# Altium PCB Oscilloscope_O.P.PcbDoc (part 2 of 2)
Units mm, origin at the board's own origin, x right, y up, seen from the top; angles counter-clockwise.
Board outline 97.16 x 92.08 mm, 4 copper layers (L1 (Sig), L2 (GND), L3 (GND), L4 (Sig)), stack 1.589 mm thick; 119 components, 103 nets, 464 pads, 437 vias.
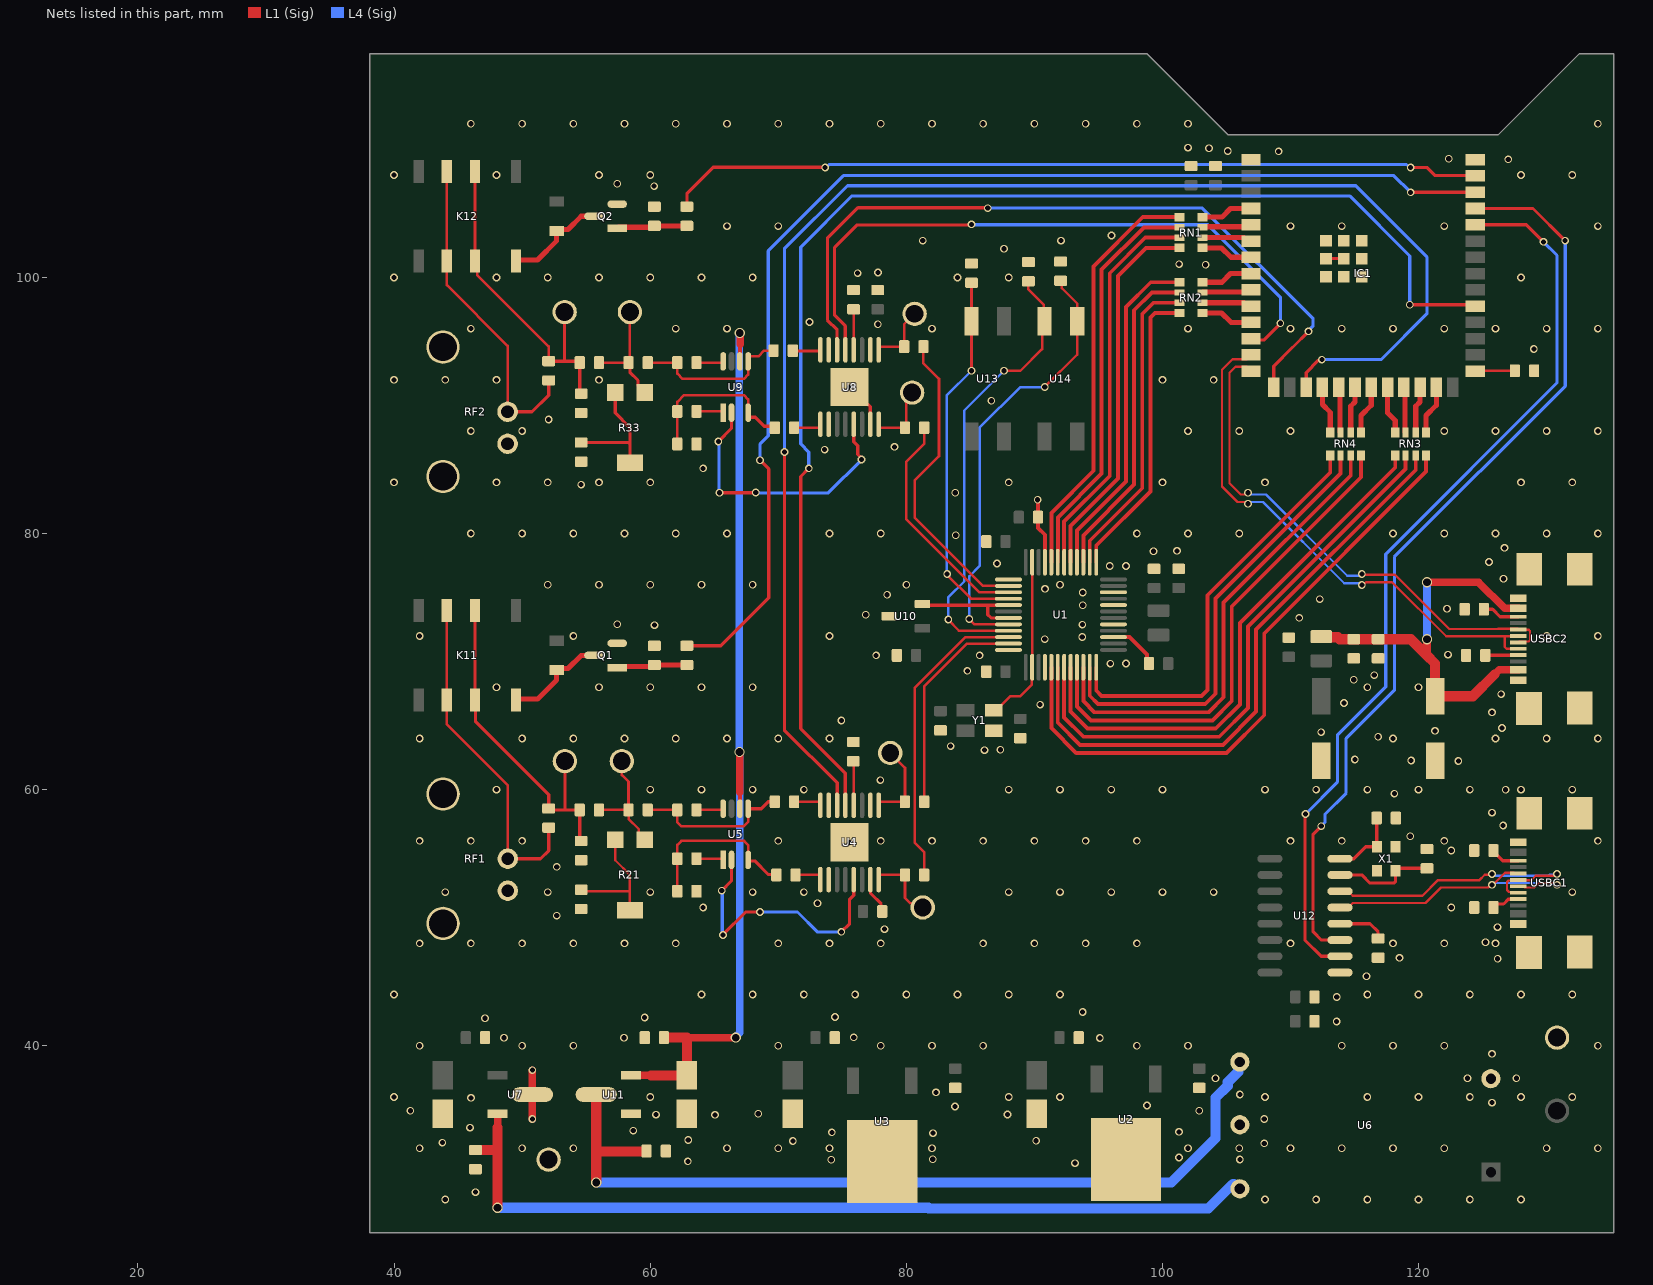
[diagram p4: the nets of this part, all layers, seen from the top]

## Via types
v1: diameter 0.6, hole 0.4, L1 (Sig) to L4 (Sig), 415 vias
v2: diameter 0.8, hole 0.6, L1 (Sig) to L4 (Sig), 22 vias

## Nets (pads, with @x,y where several pads share a name; then routed paths per layer and width w, separated by ;. In a path a pad name is that pad's centre, name@x,y a point inside that pad or via, vN(x,y) a via of type N, cw(c..) or ccw(c..) an arc to the next point about the centre after c; other vN are vias at no path point) (continued)
-5V: C35.1 C36.2 U5.6 U9.6 U11.3 | length 74.7
  L1 (Sig) w0.3: U5.6@67,58.515 67,59.798 ; U9.6@67.01,93.451 67.01,94.767
  L1 (Sig) w0.6: U11.3@58.506,37.695 60.068,37.695 60.075,37.688 ; 62.865,40.64 v2(66.675,40.64) ; v2(66.975,62.946) 67,62.921 67,59.798 ; 67.024,94.781 v2@67.024,95.625
  L1 (Sig) w0.8: 60.075,37.688 62.858,37.688 C36.2@62.865,37.695 62.865,40.64 C35.1@61.075,40.64
  L4 (Sig) w0.6: v2(66.675,40.64) 66.675,40.694 66.994,41.013 66.994,62.927 v2(66.975,62.946) ; v2@66.942,62.979 66.942,95.558 66.99,95.605 v2(66.99,95.66)
CH1_AC1: C33.2 K12.3 K12.6 RF2.1 | length 25.6
  L1 (Sig) w0.2: K12.3@44.12,108.275 K12.6@44.12,101.275 44.12,99.39 48.865,94.645 RF2.1@48.865,89.505
  L1 (Sig) w0.254: RF2.1@48.865,89.505 50.77,89.505 52.07,90.805 C33.2@52.07,91.96
CH1_AC2: C33.1 C37.1 K9.1 K12.2 K12.7 R29.2 | length 26.1
  L1 (Sig) w0.2: K12.2@46.32,108.275 K12.7@46.32,101.275 46.493,101.102 46.493,100.192 52.07,94.615 C33.1@52.07,93.46 ; C37.1@54.51,90.92 C37.1@54.61,90.92
  L1 (Sig) w0.254: C33.1@52.07,93.46 53.315,93.46 ; K9.1@53.315,97.296 53.315,93.46 ; C37.1@54.61,90.92 54.495,91.035 R29.2@54.495,93.345 54.38,93.46 53.315,93.46
CH1_ADC_signal_H: K7.1 R22.1 U8.8 | length 5.6
  L1 (Sig) w0.2: U8.8@77.84,88.54 77.84,88.334 77.909,88.265 R22.1@79.895,88.265 ; K7.1@80.45,91.009 80.391,91.068 80.272,91.068 80.01,90.807 R22.1@80.01,88.38 ; R22.1@79.895,88.265 R22.1@80.01,88.38 ; R22.1@79.895,88.265 R22.1@80.01,88.38
CH1_ADC_signal_L: K8.1 R24.1 U8.9 | length 5.1
  L1 (Sig) w0.2: U8.9@77.84,94.34 77.84,94.526 77.909,94.595 79.132,94.595 R24.1@79.832,94.595 79.832,96.342 K8.1@80.645,97.155
CH1_feedback+: R26.1 R27.1 R28.2 U9.5 | length 12.5
  L1 (Sig) w0.2: R27.1@59.805,93.345 R28.2@62.115,93.345 62.115,92.484 62.524,92.075 67.31,92.075 67.65,92.415 67.65,93.732 67.759,93.841 68.441,93.841 68.879,94.279 R26.1@69.634,94.279
CH1_feedback-: R25.1 R31.1 R32.2 U9.4 | length 12.9
  L1 (Sig) w0.2: R31.1@62.115,86.995 R32.2@62.115,89.535 62.115,90.27 62.65,90.805 67.31,90.805 67.65,90.465 U9.4@67.65,89.44
  L1 (Sig) w0.254: U9.4@67.65,89.44 67.65,89.157 67.734,89.073 68.211,89.073 68.906,88.377 69.623,88.377 R25.1@69.735,88.265
CH1_Relay: IC1.39 R37.1 | length 63.9
  L1 (Sig) w0.254: R37.1@62.865,105.525 62.865,106.539 64.921,108.594 v1@73.651,108.594 ; v1(119.38,108.585) 120.65,108.585 121.285,107.95 124.39,107.95 IC1.39@124.42,107.92
  L4 (Sig) w0.254: v1(73.66,108.585) 73.751,108.585 73.982,108.816 119.058,108.816 119.289,108.585 v1(119.38,108.585)
CH2_AC1: C28.2 K11.3 K11.6 RF1.1 | length 26.6
  L1 (Sig) w0.2: K11.3@44.12,73.985 K11.6@44.12,66.985 44.12,65.1 48.88,60.34 RF1.1@48.88,54.61
  L1 (Sig) w0.254: RF1.1@48.88,54.61 51.435,54.61 52.07,55.245 C28.2@52.07,57.035
CH2_AC2: C28.1 C29.1 K4.1 K11.2 K11.7 R17.2 | length 27
  L1 (Sig) w0.2: K11.7@46.24,66.905 K11.7@46.32,66.985 K11.2@46.32,73.985 ; C29.1@54.343,55.728 C29.1@54.61,55.995
  L1 (Sig) w0.254: K11.7@46.24,66.905 46.355,66.79 46.355,65.334 52.07,59.619 C28.1@52.07,58.535 52.185,58.42 53.34,58.42 ; K4.1@53.34,62.23 53.34,58.42 ; C29.1@54.61,55.995 54.495,56.11 R17.2@54.495,58.42 53.34,58.42
CH2_ADC_signal_H: K3.1 R12.1 U4.8 | length 5.9
  L1 (Sig) w0.2: U4.8@77.84,52.98 77.84,53.271 77.909,53.34 R12.1@79.895,53.34 79.895,51.55 80.32,51.125 80.955,51.125 K3.1@81.28,50.8
CH2_ADC_signal_L: K6.1 R16.1 U4.9 | length 6.6
  L1 (Sig) w0.2: U4.9@77.84,58.78 77.84,58.986 77.909,59.055 R16.1@79.895,59.055 ; K6.1@78.74,62.865 79.895,61.71 R16.1@79.895,59
CH2_feedback+: R13.1 R14.1 R15.2 U5.5 | length 12.4
  L1 (Sig) w0.2: R14.1@59.805,58.42 R15.2@62.115,58.42 62.115,57.444 62.409,57.15 67.31,57.15 67.65,57.49 U5.5@67.65,58.515 U5.5@67.664,58.515
  L1 (Sig) w0.254: U5.5@67.664,58.515 68.675,58.515 69.215,59.055 R13.1@69.735,59.055
CH2_feedback-: R11.1 R19.1 R20.2 U5.4 | length 13.2
  L1 (Sig) w0.2: R19.1@62.115,52.07 R20.2@62.115,54.61 62.115,55.678 62.432,55.995 67.323,55.995 67.65,55.668 U5.4@67.65,54.515
  L1 (Sig) w0.254: U5.4@67.65,54.515 67.657,54.515 67.734,54.438 68.157,54.438 69.218,53.377 69.813,53.377 R11.1@69.85,53.34
CH2_Relay: IC1.38 R38.1 | length 93.8
  L1 (Sig) w0.254: R38.1@62.865,71.235 65.52,71.235 69.261,74.976 69.261,85.044 v1(68.58,85.725) ; v1(119.383,106.64) 124.41,106.64 IC1.38@124.42,106.65
  L4 (Sig) w0.254: v1(68.58,85.725) 68.58,86.995 69.215,87.63 69.215,102.072 75.092,107.948 118.075,107.948 v1(119.383,106.64)
CLCK1: IC1.12 U8.13 | length 51.2
  L1 (Sig) w0.254: U8.13@75.24,94.34 75.24,96.21 74.4,97.05 74.4,102.34 76.155,104.095 85.045,104.095 v1(85.09,104.14) ; IC1.12@106.92,95.22 107.034,95.106 107.919,95.106 109.207,96.394 v1(109.207,96.422)
  L4 (Sig) w0.254: v1(85.09,104.14) 85.113,104.117 103.528,104.117 109.22,98.425 109.22,96.434 v1(109.207,96.422)
CLCK2: IC1.31 U4.13 | length 105.7
  L1 (Sig) w0.254: v1(72.39,85.09) 71.755,84.455 71.755,64.77 75.24,61.285 U4.13@75.24,58.78 ; v1(119.309,97.861) 124.319,97.861 IC1.31@124.42,97.76
  L4 (Sig) w0.254: v1(72.39,85.09) 72.39,86.36 71.755,86.995 71.755,102.362 75.758,106.365 114.615,106.365 119.309,101.671 v1(119.309,97.861)
CON1_USB_N: U12.6 USBC1.A7 USBC1.B7 | length 23.7
  L1 (Sig) w0.18: U12.6@113.861,52.07 114.513,52.07 114.858,51.725 120.305,51.725 121.519,52.939 124.749,52.939 125.16,53.35 125.658,53.35 v1(125.73,53.422) ; USBC1.B7@127.795,51.955 127.735,52.015 127.055,52.015 126.905,52.165 126.905,52.8 127.01,52.905 127.235,52.905 127.285,52.955 USBC1.A7@127.795,52.955 127.815,52.935 128.794,52.935 129.144,53.285 130.559,53.285 130.696,53.422 v1(130.81,53.422)
  L4 (Sig) w0.18: v1(125.73,53.422) 125.844,53.422 125.981,53.285 130.175,53.285 130.24,53.35 130.738,53.35 v1(130.81,53.422)
CON1_USB_P: U12.5 USBC1.A6 USBC1.B6 | length 22.7
  L1 (Sig) w0.18: U12.5@113.861,50.8 114.513,50.8 114.858,51.145 120.545,51.145 121.759,52.359 125.415,52.359 125.624,52.568 125.811,52.568 126.758,53.515 127.444,53.515 USBC1.B6@127.387,53.459 ; USBC1.A6@128.27,52.355 129.035,52.355 129.384,52.705 130.559,52.705 130.696,52.568 v1(130.81,52.568)
  L4 (Sig) w0.18: v1(125.73,52.568) 125.844,52.568 125.981,52.705 130.175,52.705 130.24,52.64 130.738,52.64 v1(130.81,52.568)
D0A: RN2.8 U1.37 | length 23.3
  L1 (Sig) w0.3: U1.37@94.825,77.76 94.825,79.06 99.06,83.295 99.06,96.861 99.424,97.225 RN2.8@101.335,97.225
D0A_ESP: IC1.11 RN2.1 | length 4.1
  L1 (Sig) w0.4: RN2.1@103.135,97.225 104.61,97.225 105.345,96.49 IC1.11@106.92,96.49
D0B: RN4.5 U1.24 | length 33.2
  L1 (Sig) w0.3: U1.24@94.825,69.56 94.825,67.735 95.25,67.31 103.043,67.31 103.505,67.772 103.505,75.181 113.1,84.776 RN4.5@113.1,86.095
D0B_ESP: IC1.18 RN4.4 | length 3.8
  L1 (Sig) w0.4: IC1.18@112.495,91.43 112.495,90.07 113.1,89.465 RN4.4@113.1,87.895
D1A: RN2.7 U1.38 | length 24.4
  L1 (Sig) w0.3: U1.38@94.325,77.76 94.325,79.438 98.425,83.538 98.425,97.155 99.295,98.025 RN2.7@101.335,98.025
D1A_ESP: IC1.10 RN2.2 | length 3.9
  L1 (Sig) w0.4: RN2.2@103.135,98.025 106.355,98.025 106.62,97.76 IC1.10@106.92,97.76
D1B: RN4.6 U1.23 | length 35.3
  L1 (Sig) w0.3: U1.23@94.325,69.56 94.325,68.66 94.327,68.658 94.327,67.337 94.967,66.697 103.341,66.697 104.14,67.495 104.14,74.93 113.9,84.69 RN4.6@113.9,86.095
D1B_ESP: IC1.19 RN4.3 | length 3.6
  L1 (Sig) w0.4: IC1.19@113.765,91.43 113.85,91.345 113.85,87.945 RN4.3@113.9,87.895
D2A: RN2.6 U1.39 | length 25.4
  L1 (Sig) w0.3: U1.39@93.825,77.76 93.825,79.855 97.79,83.82 97.79,97.438 99.177,98.825 RN2.6@101.335,98.825
D2A_ESP: IC1.9 RN2.3 | length 3.9
  L1 (Sig) w0.4: RN2.3@103.135,98.825 103.185,98.875 106.765,98.875 IC1.9@106.92,99.03
D2B: RN4.7 U1.22 | length 37.4
  L1 (Sig) w0.3: U1.22@93.825,69.56 93.825,66.921 94.706,66.04 103.598,66.04 104.775,67.217 104.775,74.608 114.7,84.533 RN4.7@114.7,86.095
D2B_ESP: IC1.20 RN4.2 | length 3.7
  L1 (Sig) w0.4: RN4.2@114.7,87.895 114.7,89.935 115.035,90.27 IC1.20@115.035,91.43
D3A: RN2.5 U1.40 | length 26.5
  L1 (Sig) w0.3: U1.40@93.325,77.76 93.325,80.236 97.155,84.066 97.155,97.699 99.081,99.625 RN2.5@101.335,99.625
D3A_ESP: IC1.8 RN2.4 | length 4.1
  L1 (Sig) w0.4: RN2.4@103.135,99.625 104.64,99.625 105.315,100.3 IC1.8@106.92,100.3
D3B: RN4.8 U1.21 | length 39.6
  L1 (Sig) w0.3: U1.21@93.325,69.56 93.325,66.502 94.422,65.405 103.898,65.405 105.41,66.917 105.41,74.304 115.5,84.394 RN4.8@115.5,86.095
D3B_ESP: IC1.21 RN4.1 | length 3.9
  L1 (Sig) w0.4: RN4.1@115.5,87.895 115.5,89.21 116.305,90.015 IC1.21@116.305,91.43
D4A: RN1.8 U1.41 | length 29.6
  L1 (Sig) w0.3: U1.41@92.825,77.76 92.825,80.591 96.52,84.286 96.52,100.1 98.725,102.305 RN1.8@101.335,102.305
D4A_ESP: IC1.7 RN1.1 | length 4.1
  L1 (Sig) w0.4: RN1.1@103.135,102.305 104.61,102.305 105.345,101.57 IC1.7@106.92,101.57
D4B: RN3.5 U1.20 | length 42.5
  L1 (Sig) w0.3: U1.20@92.825,69.56 92.825,66.098 94.153,64.77 104.159,64.77 106.045,66.656 106.045,73.025 118.18,85.16 RN3.5@118.18,86.095
D4B_ESP: IC1.22 RN3.4 | length 3.8
  L1 (Sig) w0.4: IC1.22@117.575,91.43 117.575,89.435 118.18,88.83 RN3.4@118.18,87.895
D5A: RN1.7 U1.42 | length 30.6
  L1 (Sig) w0.3: U1.42@92.325,77.76 92.325,80.931 95.885,84.491 95.885,100.33 98.66,103.105 RN1.7@101.335,103.105
D5A_ESP: IC1.6 RN1.2 | length 3.9
  L1 (Sig) w0.4: RN1.2@103.135,103.105 106.355,103.105 106.62,102.84 IC1.6@106.92,102.84
D5B: RN3.6 U1.19 | length 44.6
  L1 (Sig) w0.3: U1.19@92.325,69.56 92.325,65.645 93.835,64.135 104.433,64.135 106.68,66.382 106.68,72.752 118.969,85.041 RN3.6@118.969,86.095
D5B_ESP: IC1.23 RN3.3 | length 3.6
  L1 (Sig) w0.4: IC1.23@118.845,91.43 118.93,91.345 118.93,87.945 RN3.3@118.98,87.895
D6A: RN1.6 U1.43 | length 31.7
  L1 (Sig) w0.3: U1.43@91.825,77.767 91.825,78.66 91.832,78.667 91.832,81.263 95.25,84.681 95.25,100.605 98.55,103.905 RN1.6@101.335,103.905
D6A_ESP: IC1.5 RN1.3 | length 3.9
  L1 (Sig) w0.4: RN1.3@103.135,103.905 103.185,103.955 106.765,103.955 IC1.5@106.92,104.11
D6B: RN3.7 U1.18 | length 46.8
  L1 (Sig) w0.3: U1.18@91.825,69.56 91.825,68.66 91.825,65.232 93.557,63.5 104.72,63.5 107.315,66.095 107.315,72.497 119.78,84.962 RN3.7@119.78,86.095
D6B_ESP: IC1.24 RN3.2 | length 3.7
  L1 (Sig) w0.4: RN3.2@119.78,87.895 119.78,89.935 120.115,90.27 IC1.24@120.115,91.43
D7A: RN1.5 U1.44 | length 32.8
  L1 (Sig) w0.3: U1.44@91.325,77.76 91.325,79.368 91.332,79.375 91.332,81.618 94.615,84.901 94.615,100.858 98.462,104.705 RN1.5@101.335,104.705
D7A_ESP: IC1.4 RN1.4 | length 4.1
  L1 (Sig) w0.4: RN1.4@103.135,104.705 104.64,104.705 105.315,105.38 IC1.4@106.92,105.38
D7B: RN3.8 U1.17 | length 48.9
  L1 (Sig) w0.3: U1.17@91.325,69.56 91.325,64.803 93.263,62.865 105.002,62.865 107.95,65.813 107.95,72.203 120.58,84.833 RN3.8@120.58,86.095
D7B_ESP: IC1.25 RN3.1 | length 3.9
  L1 (Sig) w0.4: RN3.1@120.58,87.895 120.58,89.21 121.385,90.015 IC1.25@121.385,91.43
DATA1: IC1.15 U8.14 | length 58.1
  L1 (Sig) w0.254: U8.14@74.59,94.34 74.59,95.922 73.843,96.67 73.843,103.053 76.223,105.433 86.337,105.433 v1(86.36,105.41) ; IC1.15@108.685,91.43 108.685,93.074 110.139,94.528 110.153,94.528 v1(111.41,95.785)
  L4 (Sig) w0.254: v1(86.36,105.41) 103.117,105.411 111.76,96.768 111.76,96.229 111.41,95.878 v1(111.41,95.785)
DATA2: IC1.17 U4.14 | length 116.6
  L1 (Sig) w0.254: v1(70.485,86.36) 70.485,64.645 74.599,60.531 74.599,58.789 U4.14@74.59,58.78 ; IC1.17@111.225,91.43 111.225,92.566 112.175,93.516 112.382,93.516 v1(112.449,93.582)
  L4 (Sig) w0.254: v1(70.485,86.36) 70.485,102.235 75.405,107.155 115.095,107.155 120.65,101.6 120.65,97.155 117.083,93.588 v1@112.455,93.588
GND: C1.1 C2.2 C3.2 C4.2 C5.2 C6.2 C7.2 C8.1 C9.1 C10.1 C11.2 C12.2 C13.2 C14.2 C15.2 C16.2 C17.2 C18.2 C19.2 C20.2 C21.2 C22.2 C23.2 C24.1 C25.2 C26.2 C27.1 C29.2 C30.2 C31.2 C32.1 C34.2 C35.2 C36.1 C37.2 C38.1 C39.1 IC1.1 IC1.40 IC1.41 IC1.42 IC1.43 IC1.44 IC1.45 IC1.46 IC1.47 IC1.48 IC1.49 K2.1 K?.1 Q1.2 Q2.2 R1.1 R3.2 R4.2 R6.2 R7.2 R8.1 R9.1 R10.1 R18.1 R19.2 R23.2 R30.1 R31.2 R34.2 R35.2 R36.2 RF1.2 RF1.3 RF1.4 RF2.2 RF2.3 RF2.4 U1.1 U1.12 U1.16 U1.27 U1.29 U1.32 U1.34 U1.45 U2.4 U3.4 U4.2 U4.7 U4.10 U4.15 U4.17 U6.2 U6.4 U7.2 U8.2 U8.7 U8.10 U8.15 U8.17 U10.3 U11.1 U12.1 USBC1.13 USBC1.14 USBC1.15 USBC1.16 USBC1.A1B12 USBC1.B1A12 USBC2.13 USBC2.14 USBC2.15 USBC2.16 USBC2.A1B12 USBC2.B1A12 X1.2 X1.4 Y1.2 | length 22.8
  L1 (Sig) w0.254: U4.2@73.94,52.98 U4.2@73.94,53.805 ; U8.17@76.765,91.44 76.765,90.24 76.938,90.067 77.041,90.067 77.19,89.918 U8.7@77.19,88.54 ; U4.7@77.19,53.805 U4.7@77.19,52.98 77.208,52.962 77.208,51.895 78.026,51.076 78.026,50.687 C39.1@78.267,50.446 ; IC1.44@112.77,101.47 IC1.41@114.17,101.47
  L1 (Sig) w0.3: v1(90.254,82.637) 90.27,82.621 90.27,81.295 C15.2@90.285,81.28 90.285,80.441 90.825,79.901 U1.45@90.825,77.76 ; U1.27@96.175,71.91 97.434,71.91 98.781,70.564 98.781,70.014 C13.2@98.945,69.85
  L1 (Sig) w0.4: R34.2@54.61,85.61 R34.2@54.725,85.725 ; Q1.2@57.425,71.435 Q1.2@57.459,71.401 ; Q2.2@57.425,105.725 Q2.2@57.459,105.691 ; R35.2@60.159,71.401 R35.2@60.325,71.235 ; R36.2@60.159,105.691 R36.2@60.325,105.525
  L1 (Sig) w0.6: v1(50.8,34.29) U7.2@50.8,36.195 v1(50.8,38.1)
  other v1: 44,28 108,28 112,28 116,28 120,28 124,28 128,28 46.355,28.575 93.173,30.836 62.94,30.977 74.142,31.1 106.045,31.115 82.06,31.141 101.294,31.284 42,32 50,32 54,32 66,32 70,32 74,32 82,32 102,32 106,32 110,32 114,32 118,32 122,32 130,32 134,32 107.95,32.385 43.77,32.44 71.139,32.564 90.14,32.586 62.969,32.637 82.08,33.176 74.182,33.238 101.294,33.278 58.679,33.372 45.932,33.611 107.95,34.29 65.056,34.606 60.457,34.621 87.901,34.642 68.435,34.695 41.275,34.925 102.87,34.925 83.803,35.266 98.791,35.334 125.73,35.56 46.014,35.936 40,36 60,36 88,36 92,36 108,36 116,36 120,36 124,36 128,36 132,36 106.045,36.195 82.322,36.364 104.14,37.465 123.825,37.465 127.635,37.465 125.73,39.37 42,40 50,40 54,40 70,40 78,40 82,40 86,40 98,40 102,40 114,40 118,40 122,40 134,40 95.109,40.614 48.583,40.629 57.96,40.632 75.892,40.661 113.6,41.896 47.102,42.153 59.567,42.214 74.428,42.253 93.764,42.644 113.614,43.806 40,44 64,44 68,44 72,44 76,44 80,44 84,44 88,44 92,44 116,44 120,44 124,44 128,44 132,44 115.93,45.434 126.173,46.796 118.509,46.869 42,48 46,48 50,48 54,48 58,48 62,48 70,48 74,48 78,48 86,48 90,48 94,48 98,48 110,48 118,48 122,48 126,48 125.22,48.082 78.298,49.107 126.158,49.267 52.705,50.165 64.135,50.8 122.555,50.8 73.067,51.129 44,52 52,52 60,52 68,52 72,52 88,52 92,52 96,52 100,52 104,52 132,52 52.705,53.975 122.555,55.245 75.565,55.88 42,56 46,56 50,56 70,56 78,56 82,56 86,56 90,56 94,56 98,56 110,56 114,56 122,56 134,56 119.346,56.363 126.604,57.204 125.73,58.205 118.11,59.69 48,60 60,60 64,60 68,60 72,60 88,60 92,60 96,60 100,60 108,60 112,60 116,60 120,60 124,60 126.799,59.996 128,60 132,60 77.975,60.745 123.102,62.243 119.421,62.271 115.022,62.358 86.101,63.084 87.346,63.113 83.461,63.398 42,64 50,64 54,64 58,64 62,64 66,64 70,64 74,64 118,64 126,64 130,64 134,64 116.84,64.135 112.392,64.494 121.283,64.595 126.519,64.823 74.93,65.405 125.73,66.04 90.446,66.637 114.175,66.773 126.447,67.463 48,68 56,68 60,68 64,68 68,68 116,68 120,68 114.935,68.58 116.539,68.941 84.764,69.274 95.934,69.842 97.155,69.85 77.644,70.484 85.725,70.485 122.302,70.543 90.805,71.755 93.733,71.919 42,72 54,72 74,72 130,72 134,72 60.336,72.844 93.746,72.888 57.432,72.914 110.677,73.417 76.835,73.66 122.222,74.124 93.772,74.405 112.282,74.876 78.505,75.216 93.778,75.393 90.833,75.68 52,76 56,76 60,76 64,76 68,76 80,76 92,76 126.635,76.469 95.885,77.47 97.155,77.47 87.075,77.666 125.499,77.776 99.297,78.621 101.136,78.65 126.706,78.879 83.863,79.864 46,80 50,80 54,80 58,80 62,80 66,80 74,80 78,80 98,80 102,80 106,80 118,80 122,80 126,80 130,80 134,80 83.82,83.185 54.61,83.82 40,84 48,84 52,84 56,84 60,84 88,84 100,84 108,84 128,84 132,84 64.135,85.09 73.621,86.552 79.073,86.767 46,88 50,88 102,88 106,88 110,88 122,88 126,88 130,88 134,88 52.07,88.9 86.642,90.371 75.565,91.44 40,92 44,92 48,92 56,92 100,92 104,92 128.998,94.41 46,96 62,96 66,96 82,96 102,96 110,96 114,96 118,96 122,96 126,96 130,96 134,96 77.774,96.346 72.436,96.52 40,100 48,100 52,100 56,100 60,100 64,100 68,100 84,100 88,100 128,100 76.2,100.33 77.783,100.387 103.372,100.985 101.302,101.035 87.63,102.235 81.28,102.87 92.075,102.87 96.016,103.277 66,104 70,104 110,104 114,104 122,104 134,104 60.31,107.13 57.427,107.31 40,108 48,108 56,108 60,108 128,108 132,108 127,109.22 122.353,109.264 109.075,109.843 105.102,109.873 103.629,110.086 101.993,110.131 46,112 50,112 54,112 58,112 62,112 66,112 70,112 74,112 78,112 82,112 86,112 90,112 94,112 98,112 102,112 134,112
NetC1_2: C1.2 U12.4 | length 3.8
  L1 (Sig) w0.254: U12.4@113.861,49.53 116.205,49.53 116.84,48.895 C1.2@116.84,48.375
NetC6_1: C6.1 U12.7 X1.1 | length 8
  L1 (Sig) w0.254: U12.7@113.861,53.34 115.57,53.34 116.205,52.705 118.051,52.705 118.2,52.854 X1.1@118.2,53.685 118.375,53.86 C6.1@120.65,53.86
NetC7_1: C7.1 U12.8 X1.3 | length 5.5
  L1 (Sig) w0.254: U12.8@113.861,54.61 114.935,54.61 115.86,55.535 X1.3@116.75,55.535 116.738,55.547 116.738,57.773 C7.1@116.725,57.785
NetC8_2: C8.2 C9.2 C11.1 FB1.1 USBC2.A4B9 USBC2.B4A9 | length 33.4
  L1 (Sig) w0.6: 120.65,70.485 v2(120.65,71.755) ; v2(120.65,76.2) 124.672,76.2 126.716,74.155 USBC2.B4A9@127.795,74.155 ; 125.928,68.99 126.293,69.355 USBC2.A4B9@127.795,69.355
  L1 (Sig) w0.8: FB1.1@112.395,71.955 112.447,71.903 113.679,71.903 113.827,71.755 C9.2@114.935,71.755 C8.2@116.84,71.755 119.38,71.755 120.65,70.485 121.285,69.85 C11.1@121.285,67.295 124.233,67.295 125.928,68.99
  L4 (Sig) w0.6: v2(120.65,71.755) v2(120.65,76.2)
NetC30_1: C30.1 U6.3 U7.3 | length 68
  L1 (Sig) w0.6: 48.088,33.722 U7.3@48.088,34.695
  L1 (Sig) w0.8: C30.1@46.355,31.865 47.964,31.865 48.079,31.75 ; v2(48.079,27.35) 48.079,31.75 ; 48.079,33.628 48.079,31.75
  L4 (Sig) w0.8: v2(48.079,27.35) 81.703,27.35 81.747,27.305 103.594,27.305 105.499,29.21 105.596,29.21 105.971,28.835 U6.3@106.045,28.835
NetC34_1: C34.1 U6.5 U11.2 | length 67.2
  L1 (Sig) w0.8: v2(55.794,29.323) 55.794,31.836 ; U11.2@55.794,36.195 55.794,31.836 ; C34.1@59.575,31.75 55.88,31.75 55.794,31.836
  L4 (Sig) w0.8: v2(55.794,29.323) 100.683,29.323 104.14,32.78 104.14,35.935 105.094,36.889 105.094,37.149 105.911,37.966 105.911,38.601 U6.5@106.045,38.735
NetD1_2: D1.2 K11.8 Q1.3 | length 8.1
  L1 (Sig) w0.4: K11.8@49.52,66.985 49.601,67.066 51.191,67.066 52.694,68.569 52.694,69.324 D1.2@52.705,69.335 ; D1.2@52.555,69.335 52.677,69.457 53.582,69.457 54.61,70.485 Q1.3@55.605,70.485
NetD2_2: D2.2 K12.8 Q2.3 | length 8.1
  L1 (Sig) w0.4: K12.8@49.52,101.275 49.601,101.356 51.191,101.356 52.694,102.859 52.694,103.614 D2.2@52.705,103.625 ; D2.2@52.555,103.625 52.677,103.747 53.582,103.747 54.61,104.775 Q2.3@55.605,104.775
NetIC1_27: IC1.27 R1.2 | length 3.1
  L1 (Sig) w0.2: IC1.27@124.42,92.68 124.45,92.71 R1.2@127.52,92.71
NetK5_1: K5.1 R14.2 R17.1 R21.3 | length 9.2
  L1 (Sig) w0.2: R17.1@55.995,58.42 58.037,58.42 R14.2@58.305,58.42 ; K5.1@57.785,62.23 57.785,61.148 58.305,60.628 R14.2@58.305,58.42 ; R21.3@59.57,56.09 59.107,56.553 59.107,56.923 58.322,57.708 58.322,58.403 R14.2@58.305,58.42
NetK10_1: K10.1 R27.2 R29.1 R33.3 | length 9.6
  L1 (Sig) w0.2: R29.1@55.995,93.345 57.785,93.345 ; R27.2@58.305,93.345 58.095,93.345 R27.2@58.005,93.345 ; K10.1@58.42,97.296 58.42,93.745 58.33,93.655 58.095,93.655 58.095,93.435 R27.2@58.005,93.345 ; 57.785,93.345 R27.2@58.005,93.345 ; 57.785,93.345 R27.2@58.005,93.345
  L1 (Sig) w0.254: R27.2@58.305,93.345 58.42,93.23 58.42,92.584 59.047,91.957 59.047,91.538 R33.3@59.57,91.015
NetQ1_1: Q1.1 R35.1 R38.2 | length 5.5
  L1 (Sig) w0.4: Q1.1@57.425,69.535 57.898,69.535 57.987,69.624 58.218,69.624 58.222,69.627 60.217,69.627 R35.1@60.325,69.735 R38.2@62.865,69.735
NetQ2_1: Q2.1 R36.1 R37.2 | length 5.5
  L1 (Sig) w0.4: Q2.1@57.425,103.825 57.514,103.914 60.214,103.914 R36.1@60.325,104.025 R37.2@62.865,104.025
NetR3_1: R3.1 USBC1.A5 | length 2.2
  L1 (Sig) w0.254: R3.1@125.845,50.8 126.118,51.073 126.638,51.073 127,51.435 127.775,51.435 USBC1.A5@127.795,51.455
NetR4_1: R4.1 USBC1.B5 | length 2.3
  L1 (Sig) w0.254: R4.1@125.845,55.245 125.845,55.145 126.118,54.872 126.159,54.872 126.576,54.455 USBC1.B5@127.795,54.455
NetR6_1: R6.1 USBC2.A5 | length 2.6
  L1 (Sig) w0.254: R6.1@125.21,70.485 125.23,70.505 USBC2.A5@127.795,70.505
NetR7_1: R7.1 USBC2.B5 | length 2.9
  L1 (Sig) w0.254: R7.1@125.098,74.082 125.778,74.082 126.355,73.505 USBC2.B5@127.795,73.505
NetR8_2: R8.2 U1.4 U13.4 | length 29.2
  L1 (Sig) w0.2: v1(83.185,76.835) 83.185,76.763 85.038,74.91 U1.4@87.975,74.91 ; v1(85.09,92.71) R8.2@85.09,99.58
  L4 (Sig) w0.2: v1(83.185,76.835) 83.15,76.87 83.15,90.77 v1(85.09,92.71)
NetR9_2: R9.2 U1.8 U14.3 | length 34.8
  L1 (Sig) w0.2: v1(84.913,73.332) 84.918,73.332 85.34,72.91 U1.8@87.975,72.91 ; v1(90.805,91.44) 93.345,93.98 U14.3@93.345,96.575 93.345,97.949 92.141,99.152 92.141,99.655 R9.2@92.061,99.735
  L4 (Sig) w0.2: v1(84.913,73.332) 84.913,76.658 85.725,77.47 85.725,88.265 88.9,91.44 v1(90.805,91.44)
NetR10_2: R10.2 U1.9 U14.4 | length 35.9
  L1 (Sig) w0.2: v1(83.282,73.285) 83.282,73.232 84.104,72.41 U1.9@87.975,72.41 ; v1(87.63,92.71) 88.9,92.71 90.597,94.407 90.597,96.367 U14.4@90.805,96.575 90.737,96.643 90.737,97.858 89.535,99.06 R10.2@89.535,99.695
  L4 (Sig) w0.2: v1(83.282,73.285) 83.282,75.027 84.525,76.27 84.525,89.605 v1(87.63,92.71)
NetR11_2: R11.2 U4.1 | length 2.3
  L1 (Sig) w0.2: R11.2@71.35,53.34 73.221,53.34 73.29,53.271 U4.1@73.29,52.98
NetR12_2: R12.2 U1.10 | length 23.9
  L1 (Sig) w0.2: R12.2@81.395,53.34 81.395,55.128 81.278,55.245 80.645,55.878 80.645,67.945 84.61,71.91 U1.10@87.975,71.91
NetR13_2: R13.2 U4.16 | length 2.3
  L1 (Sig) w0.2: R13.2@71.235,59.055 73.221,59.055 73.29,58.986 U4.16@73.29,58.78
NetR15_1: R15.1 U5.8 | length 2.1
  L1 (Sig) w0.2: R15.1@63.615,58.42 65.591,58.42 65.686,58.515 U5.8@65.7,58.515
NetR16_2: R16.2 U1.11 | length 17
  L1 (Sig) w0.2: R16.2@81.395,59.055 81.395,68.06 84.745,71.41 U1.11@87.975,71.41
NetR18_2: R18.2 U4.12 | length 3.7
  L1 (Sig) w0.2: R18.2@75.552,62.139 R18.2@75.747,62.334 ; R18.2@75.8,62.204 75.89,62.114 U4.12@75.89,58.78
NetR20_1: R20.1 U5.1 | length 2.1
  L1 (Sig) w0.2: R20.1@63.618,54.607 65.608,54.607 U5.1@65.7,54.515
NetR21_1: R21.1 R21.2 R23.1 | length 9.8
  L1 (Sig) w0.2: R23.1@54.61,52.185 54.725,52.07 58.42,52.07 ; R21.1@57.27,56.09 57.27,54.49 58.42,53.34 58.42,52.07 ; R21.2@58.42,50.59 58.42,52.07
NetR22_2: R22.2 U1.3 | length 18.1
  L1 (Sig) w0.2: R22.2@81.395,88.265 81.395,86.995 80.01,85.61 80.01,81.107 85.688,75.429 87.956,75.429 U1.3@87.975,75.41
NetR24_2: R24.2 U1.2 | length 24.2
  L1 (Sig) w0.2: R24.2@81.332,94.595 81.332,93.293 82.55,92.075 82.55,86.051 80.645,84.146 80.645,81.268 86.003,75.91 U1.2@87.975,75.91
NetR25_2: R25.2 U8.1 | length 2.3
  L1 (Sig) w0.2: R25.2@71.235,88.265 73.221,88.265 73.29,88.334 U8.1@73.29,88.54
NetR26_2: R26.2 U8.16 | length 2.2
  L1 (Sig) w0.2: R26.2@71.134,94.279 71.158,94.254 73.221,94.254 73.29,94.324 U8.16@73.29,94.34
NetR28_1: R28.1 U9.8 | length 2.1
  L1 (Sig) w0.2: R28.1@63.615,93.345 65.591,93.345 65.686,93.44 U9.8@65.7,93.44
NetR30_2: R30.2 U8.12 | length 3.2
  L1 (Sig) w0.2: U8.12@75.879,94.351 75.879,97.418 R30.2@75.959,97.498
NetR32_1: R32.1 U9.1 | length 2.1
  L1 (Sig) w0.2: R32.1@63.615,89.535 65.605,89.535 U9.1@65.7,89.44
NetR33_1: R33.1 R33.2 R34.1 | length 9.8
  L1 (Sig) w0.254: R34.1@54.61,87.11 58.305,87.11 58.42,86.995 ; R33.1@57.27,91.015 57.27,89.415 58.42,88.265 58.42,86.995 ; R33.2@58.42,85.515 58.42,86.995
NetU1_14: U1.14 U1.47 Y1.3 | length 13.4
  L1 (Sig) w0.2: Y1.3@86.825,66.205 87.025,66.205 88.13,67.31 88.9,67.31 89.806,68.216 89.806,69.541 U1.14@89.825,69.56 U1.47@89.825,77.76
REF_1.25V: U1.5 U1.7 U10.2 | length 9.2
  L1 (Sig) w0.254: U10.2@81.31,74.61 81.585,74.61 81.785,74.41 86.36,74.41 ; U1.7@87.975,73.41 86.61,73.41 86.36,73.66 86.36,74.41 ; U1.5@87.975,74.41 86.36,74.41
RX_CH340: IC1.37 U12.3 | length 72.6
  L1 (Sig) w0.254: v1(112.395,57.15) 111.76,56.515 111.76,48.895 112.395,48.26 U12.3@113.861,48.26 ; IC1.37@124.42,105.38 128.935,105.38 v1(131.445,102.87)
  L4 (Sig) w0.254: v1(112.395,57.15) 112.692,57.447 112.692,58.082 114.341,59.731 114.341,64.004 118.11,67.773 118.11,78.177 131.445,91.512 v1(131.445,102.87)
TX_CH340: IC1.36 U12.2 | length 72.3
  L1 (Sig) w0.254: v1(111.174,58.101) 111.125,58.052 111.125,48.26 112.395,46.99 U12.2@113.861,46.99 ; IC1.36@124.42,104.11 128.416,104.11 v1(129.751,102.775)
  L4 (Sig) w0.254: v1(111.174,58.101) 113.665,60.592 113.665,64.265 117.434,68.034 117.434,78.397 130.81,91.773 130.81,101.716 v1(129.751,102.775)
USB_ESP_N: IC1.13 USBC2.A7 USBC2.B7 | length 41.4
  L1 (Sig) w0.18: v1(106.68,82.331) 106.566,82.331 106.429,82.468 105.87,82.468 104.654,83.684 104.654,92.792 105.467,93.605 106.575,93.605 IC1.13@106.92,93.95 ; v1(115.57,75.981) 115.684,75.981 115.903,76.2 117.925,76.2 122.153,71.972 126.438,71.972 126.443,71.977 126.71,71.977 ; USBC2.A7@127.41,71.977 126.71,71.977 ; USBC2.B7@127.503,70.978 127.476,71.005 126.868,71.005 126.729,71.144 126.729,71.958 126.71,71.977
  L4 (Sig) w0.18: v1(106.68,82.331) 106.794,82.331 106.931,82.468 107.847,82.468 114.197,76.118 115.319,76.118 115.456,75.981 v1(115.57,75.981)
USB_ESP_P: IC1.14 USBC2.A6 USBC2.B6 | length 40.8
  L1 (Sig) w0.18: v1(106.68,83.185) 106.566,83.185 106.429,83.048 106.11,83.048 105.234,83.924 105.234,92.552 105.707,93.025 106.575,93.025 IC1.14@106.92,92.68 ; v1(115.57,76.835) 115.625,76.78 118.165,76.78 122.393,72.552 126.197,72.552 126.202,72.557 127.743,72.557 127.812,72.488 128.6,72.488 128.705,72.383 128.705,71.671 128.6,71.565 127.855,71.565 USBC2.A6@127.795,71.505
  L4 (Sig) w0.18: v1(106.68,83.185) 106.794,83.185 106.931,83.048 108.087,83.048 114.437,76.698 115.319,76.698 115.456,76.835 v1(115.57,76.835)
VOCM1: U8.5 U9.2 | length 21.9
  L1 (Sig) w0.254: v1(65.324,87.185) 66.35,88.211 U9.2@66.35,89.44 ; v1(65.405,83.185) 68.22,83.185 v1(68.244,83.208) ; U8.5@75.89,88.54 75.89,87.171 76.2,86.861 76.2,86.173 76.502,85.871 v1(76.502,85.778)
  L4 (Sig) w0.254: v1(65.324,87.185) 65.364,87.144 65.364,83.226 v1(65.405,83.185) ; v1(68.244,83.208) 68.282,83.17 73.894,83.17 v1(76.502,85.778)
VOCM2: U4.5 U5.2 | length 21.3
  L1 (Sig) w0.254: v1(65.588,52.112) 66.35,52.875 U5.2@66.35,54.515 ; v1(65.68,48.658) 67.47,50.448 v1(68.567,50.448) ; v1(74.93,48.895) 75.565,49.53 75.565,51.435 75.89,51.76 U4.5@75.89,52.98
  L4 (Sig) w0.254: v1(65.588,52.112) 65.634,52.066 65.634,48.704 v1(65.68,48.658) ; v1(68.567,50.448) 71.501,50.448 73.054,48.895 v1(74.93,48.895)
pads on no net: IC1.16 IC1.26 IC1.28 IC1.29 IC1.30 IC1.32 IC1.33 IC1.34 IC1.35 K11.4 K11.5 K12.4 K12.5 U1.6 U1.25 U1.26 U1.35 U1.36 U5.7 U9.7 U12.9 U12.10 U12.11 U12.12 U12.13 U12.14 U12.15 U13.2 U13.3 USBC1.A4B9 USBC1.A8 USBC1.B4A9 USBC1.B8 USBC2.A8 USBC2.B8

## Polygon pours and split planes (outlines as drawn)
GND on L4 (Sig) "gnd L4" (solid, pour order 5): 38.1,25.4 38.1,117.475 98.781,117.475 105.131,111.125 126.211,111.125 132.561,117.475 135.255,117.475 135.255,25.4
GND on L1 (Sig) "gnd L1" (solid, pour order 0): 38.1,25.4 38.1,117.475 98.781,117.475 105.131,111.125 126.211,111.125 132.561,117.475 135.255,117.475 135.255,25.4
GND on L3 (GND) (split plane): 134.745,25.91 38.61,25.91 38.61,116.965 98.569,116.965 104.77,110.764 104.847,110.701 104.935,110.653 105.031,110.624 105.131,110.615 126.211,110.615 126.311,110.624 126.407,110.653 126.495,110.701 126.572,110.764 132.773,116.965 134.745,116.965
GND on L2 (GND) (split plane): 134.745,25.91 38.61,25.91 38.61,116.965 98.569,116.965 104.77,110.764 104.847,110.701 104.935,110.653 105.031,110.624 105.131,110.615 126.211,110.615 126.311,110.624 126.407,110.653 126.495,110.701 126.572,110.764 132.773,116.965 134.745,116.965

## Silkscreen, mask and mechanical layers (free items; w line width, h text height)
Top Overlay:
  drawing of 3 lines, arcs and shapes, not listed
  text "Digital Oscilloscope" at 47.625,112.801 h5
  text "Test board" at 76.203,109.874 h3
  text "V1.0" at 83.188,107.334 h3
  text "CH1" at 40.008,97.809 h3
  text "USB to ESP32" at 120.65,80.029 h3
  text "CH2" at 40.643,62.884 h3
  text "USB to UART" at 120.269,43.411 h3
Bottom Overlay:
  text "Consultant: Michal Mada" at 124.78,45.624 h1.52
  text "Electrical design: Ondrej Peter Jakub Bohunicky" at 124.649,35.915 h1.52
  text "Programing: Peter Bodi" at 124.549,30.134 h1.52
Mechanical 15:
  circle w0.254: c41.91,29.21 r1.588
  circle w0.254: c131.445,29.21 r1.588
  circle w0.254: c131.445,110.49 r1.588
  circle w0.254: c41.91,113.665 r1.588
  lines w0.3: 38.1,25.4 135.255,25.4 135.255,117.475 132.561,117.475 126.211,111.125 105.131,111.125 98.781,117.475 38.1,117.475 38.1,25.4

## Text inside footprints (layer, text, board x,y; h text height)
U6: Top Overlay "Uin" at 123.841,30.781 h1.2 r180; Top Overlay "GND" at 124.091,38.031 h1.2 r180; Top Overlay "GND" at 110.591,34.531 h1.2 r180; Top Overlay "U+" at 109.841,29.531 h1.2 r180; Top Overlay "U-" at 109.591,39.281 h1.2 r180
U13: Top Overlay "ON" at 84.554,94.339 h0.5
U14: Top Overlay "ON" at 90.269,94.339 h0.5